# EAGLE board NEDC-WORKINGbrd (EAGLE 9.7.0)

Size 123.79 x 95.79 mm. Coordinates in mm from the lower left corner, seen from the top.
Outline: 0,0 123.79,0 123.79,95.78 0,95.78 0,0
Copper layers (1*16): Top 0.035mm / dielectric 1.5mm / Bottom 0.035mm
Design rules "default": minimum track width 6mil, minimum drill 0.35mm, track to track 6mil, track to pad 6mil, pad to pad 6mil, via to via 6mil, smd to smd 6mil, copper to edge 40mil, drill to drill 6mil, minimum pad ring 10mil, minimum via ring 8mil, stop-mask expansion 4mil, vias tented up to drill 0mil, thermal gap 10mil

## Footprints (pad centres in the part's own frame; a part is rotated, then mirrored left to right if it is on the bottom)
BATTERY-GENERIC = drill 1.118 pad 3.15 octagon: + 2.54,0; - -2.54,0
LEDRD254W60D565H860B_Y = drill 0.981 pad 1.581: 1 -1.27,0; 2 1.27,0
LEDRD254W60D565H860B = drill 0.981 pad 1.581: 1 -1.27,0; 2 1.27,0
LEDRD254W60D565H860B_G = drill 0.981 pad 1.581: 1 -1.27,0; 2 1.27,0
LU-5-R = drill 0.8: 1 -6.35,-3.81; 5 3.81,-3.81; 6 6.35,-3.81; 7 6.35,3.81; 8 3.81,3.81; 12 -6.35,3.81
RESAD1016W63L850D250B = drill 0.83 pad 1.43: 1 -5.08,0; 2 5.08,0
HA-06-SM065 = drill 1 pad 1.676: 1 -2.54,-2.54; 2 0,2.54; 3 2.54,-2.54
ARDUINO-UNO-R3-SHIELD = drill 1.016 pad 1.88: 3.3V 24.13,-2.54; 5V 24.13,0; A0 24.13,12.7; A1 24.13,15.24; A2 24.13,17.78; A3 24.13,20.32; A4 24.13,22.86; A5 24.13,25.4; AREF -24.13,-13.97; D2 -24.13,20.32; D3 -24.13,17.78; D4 -24.13,15.24; D5 -24.13,12.7; D6 -24.13,10.16; D7 -24.13,7.62; D8 -24.13,3.81; D9 -24.13,1.27; D10 -24.13,-1.27; D11 -24.13,-3.81; D12 -24.13,-6.35; D13 -24.13,-8.89; GND@0 24.13,2.54; GND@1 24.13,5.08; GND@2 -24.13,-11.43; IOREF 24.13,-7.62; NC 24.13,-10.16; RES 24.13,-5.08; RX -24.13,25.4; SCL -24.13,-19.05; SDA -24.13,-16.51; TX -24.13,22.86; VIN 24.13,7.62

## Placement (x,y rotation side)
BAT1  6V  [BATTERY-GENERIC]  8.26,17.88 0 top
D1  YELLOW  [LEDRD254W60D565H860B_Y]  40.6,87.88 180 top
D2  YELLOW  [LEDRD254W60D565H860B_Y]  51.77,78.26 180 top
D3  RED  [LEDRD254W60D565H860B]  61.5,83.24 180 top
D4  GREEN  [LEDRD254W60D565H860B_G]  68.52,78.71 180 top
K1  RELAY-SPDT_LU-5-R  [LU-5-R]  33.24,64.43 180 top
R1  220  [RESAD1016W63L850D250B]  50.5,73.18 90 top
R2  220  [RESAD1016W63L850D250B]  39.33,82.8 90 top
R3  220  [RESAD1016W63L850D250B]  60.23,78.16 90 top
R4  220  [RESAD1016W63L850D250B]  67.25,73.63 90 top
RPOT1  250k  [HA-06-SM065]  81.74,72.58 0 top
U1  ARDUINO-UNO-R3-SHIELD  [ARDUINO-UNO-R3-SHIELD]  89.27,29.84 270 top

## Library data of the parts
BAT1 K1 R1-R4 RPOT1 U1 = Tinkercad
D1 D2 = Tinkercad; CATEGORY: Opto-Electronic; SUB-CATEGORY: LED; VALUE: LED_YELLOW
D3 = Tinkercad; CATEGORY: Opto-Electronic; SUB-CATEGORY: LED; VALUE: LED_RED
D4 = Tinkercad; CATEGORY: Opto-Electronic; SUB-CATEGORY: LED; VALUE: LED_GREEN

## Nets
BAT1+: BAT1.+ K1.8
BAT1-: BAT1.- K1.6 R1.1 R2.1 R3.1 R4.1 RPOT1.3 U1.GND@0 U1.GND@1 U1.GND@2
D1_C: D1.2 R2.2
D2_C: D2.2 R1.2
D3_C: D3.2 R3.2
D4_C: D4.2 R4.2
U1_5V: D1.1 D2.1 K1.1 K1.12 RPOT1.1 U1.5V
U1_A0: RPOT1.2 U1.A0
U1_D7: K1.5 U1.D7
U1_D8: D3.1 U1.D8
U1_D9: D4.1 U1.D9

## Tracks (layer width: path | path; a pad name or v marks a point on that pad's centre or on a via)
BAT1+  (1 unrouted)
BAT1-  (9 unrouted)
D1_C  (1 unrouted)
D2_C  (1 unrouted)
D3_C  (1 unrouted)
D4_C  (1 unrouted)
U1_5V  (5 unrouted)
U1_A0  (1 unrouted)
U1_D7  (1 unrouted)
U1_D8  (1 unrouted)
U1_D9  (1 unrouted)